# Altium PCB Layout.PcbDoc
Units mm, origin at the board's own origin, x right, y up, seen from the top; angles counter-clockwise.
Board outline 31.5 x 41.02 mm, 2 copper layers (Top Layer, Bottom Layer); 9 components, 9 nets, 53 pads, 7 vias.
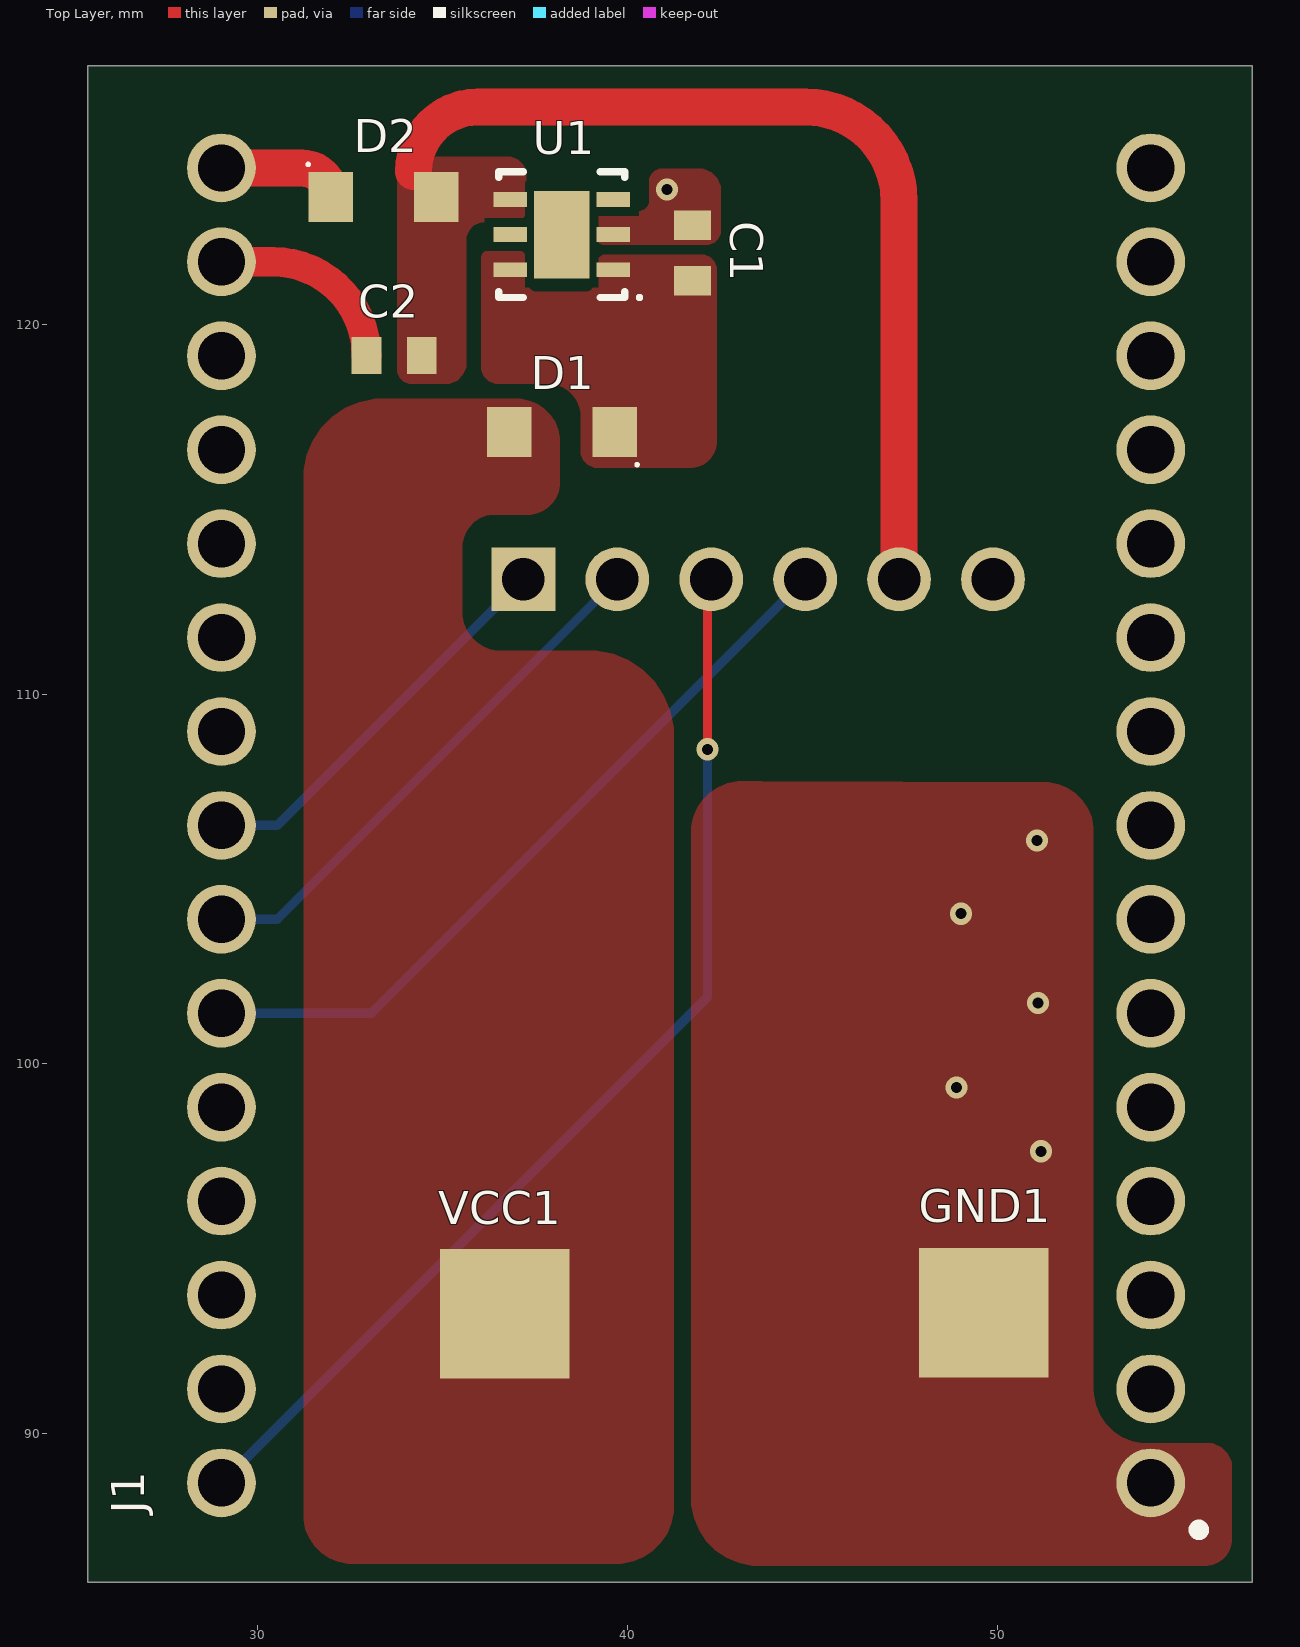
[diagram p0: Top Layer view]
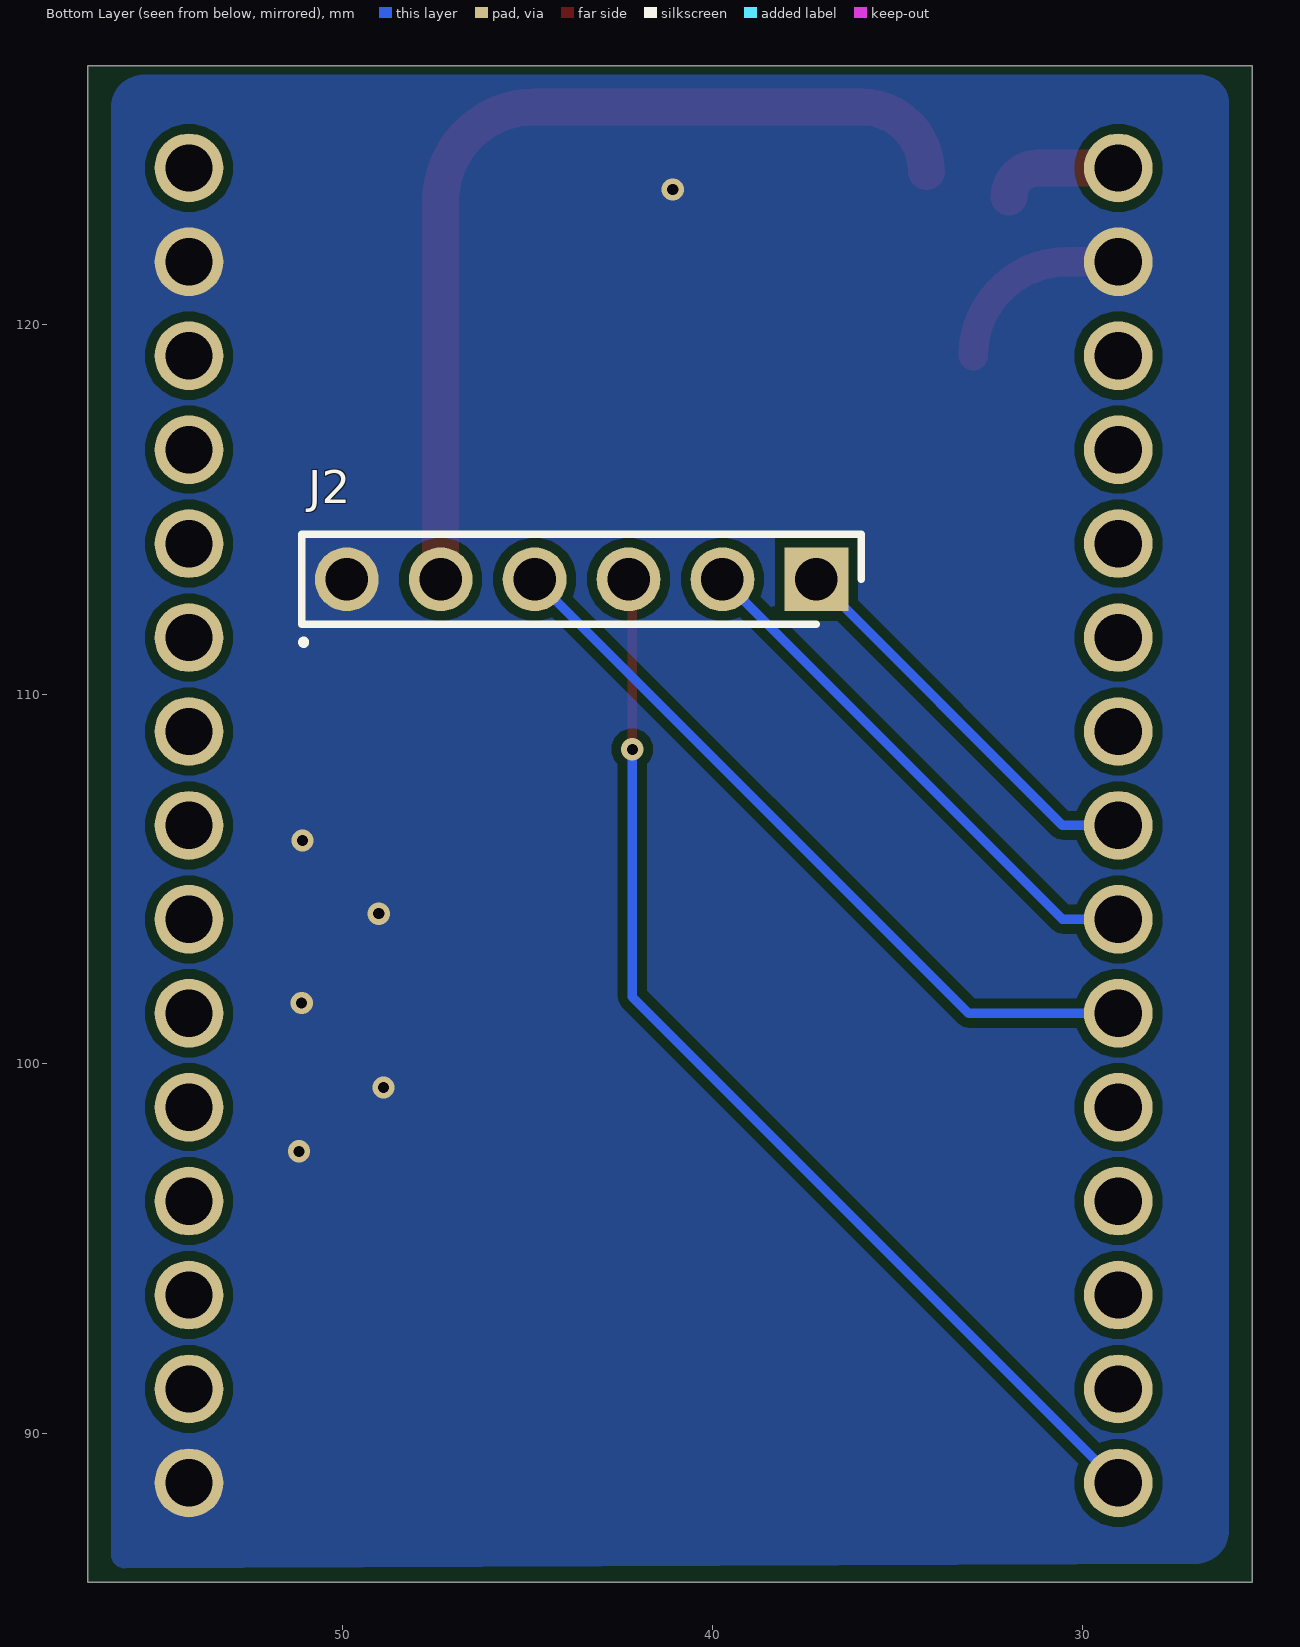
[diagram p1: Bottom Layer view, seen from below]

## Layer stack, top to bottom
Top Solder: solder mask 0.0102, Solder Resist, Dk 3.5
Top Layer: signal copper 0.0356
Dielectric 1: dielectric 0.32, FR-4, Dk 4.8
Bottom Layer: signal copper 0.0356
Bottom Solder: solder mask 0.0102, Solder Resist, Dk 3.5

## Board outline
25.4,85.979 56.896,85.979 56.896,127 25.4,127

## Design rules (kind name [scope] priority, off if disabled: settings)
Clearance [All] p1: gap=0.254 ignorepadtopadclearanceinfootprint=TRUE
PolygonConnect [All] p1: connectstyle=Direct reliefconductorwidth=0.254 reliefentries=4 polygonreliefangle="90 Angle" airgapwidth=0.254
RoutingVias [All] p1: holewidth=0.711 width=1.27 viastyle="Through Hole" minholewidth=0.711 minwidth=1.27 maxholewidth=0.711 maxwidth=1.27
SolderMaskExpansion [All] p1: expansion=0.102 istentingtop=FALSE
Width [All] p1: maxlimit=5 minlimit=0.254 preferedwidth=0.254 minimp=50.000000 maximp=50.000000 favimp=50.000000
30 further rules are at their usual default settings.

## Components (designator, comment, footprint, x,y, rotation, side; value= is the part's Value field where it differs from the comment)
C1 "1 uF" C0603 41.783,121.92 r270 top
C2 "1 uF" C0603 33.706,119.177 r0 top
D1 "RBR2MM40BTR" DIODO_SOD-123FL-2 38.227,117.094 r180 top
D2 "RBR2MM40BTR" DIODO_SOD-123FL-2 33.401,123.444 r0 top
GND1 "Ground Pad" PAD_ALIMENTAÇÃO_MINI 49.632,93.269 r0 top
J1 "ESP32" "Modulo ESP32" 53.801,88.671 r90 top
J2 "Male Header 6" "MALE HEADER 6" 37.186,113.106 r0 bottom
U1 "LDL112PV33R" DFN-6 38.225,122.428 r180 top
VCC1 "Source Pad" PAD_ALIMENTAÇÃO_MINI 36.678,93.243 r0 top

## Footprints (in the part's own frame and the unit in brackets; to place one, negate y for a bottom-side part, rotate by r counter-clockwise, add the part's x,y. Pads: shape width x height; smd on the part's side, far side on the other; paste and mask are expansions set on the pad)
C0603 [mm]
  rect 0.8x1 smd: 1(-0.763,-0.018) 2(0.737,-0.018)
  body extent -0.86,-0.49 0.84,0.41, height 0.8
DFN-6 [mm] "SON, 6-Leads, Body 3,00x3,00mm, Pitch 0,95mm, Thermal Pad 2,37x1,49mm, IPC Medium Density"
  rect 0.9x0.4 smd: 1(-1.395,0.95) 2(-1.395,0) 3(-1.395,-0.95) 4(1.395,-0.95) 5(1.395,0) 6(1.395,0.95)
  rect 1.49x2.37 smd: 7(0,0)
  silkscreen extent -2.15,-1.7 1.7,1.75, body extent -1.6,-1.55 1.6,1.55, height 1
DIODO_SOD-123FL-2 [mm]
  rect 1.2x1.35 smd: A(1.425,0) C(-1.425,0)
  silkscreen extent -2.06,0.86 -2.01,0.91, body extent -1.75,-0.85 1.75,0.85, height 0.9
"MALE HEADER 6" [mm]
  rect 1.725x1.725 hole 1.15: PIN1(0,0)
  round 1.725 hole 1.15: PIN2(2.54,0) PIN3(5.08,0) PIN4(7.62,0) PIN5(10.16,0) PIN6(12.7,0)
  silkscreen extent -1.21,-1.22 13.91,1.22, body extent -1.07,-1.17 13.77,1.17, height 10.37
"Modulo ESP32" [mm]
  round 1.86 hole 1.28: 3V3(35.56,24.779) EN(0,-0.352) GND(33.02,-0.352) GND(33.02,24.779) PIN2(2.54,-0.352) PIN3(5.08,-0.352) PIN4(7.62,-0.352) PIN5(10.16,-0.352) PIN6(12.7,-0.352) PIN7(15.24,-0.352) PIN8(17.78,-0.352) PIN9(20.32,-0.352) PIN10(22.86,-0.352) PIN11(25.4,-0.352) PIN12(27.94,-0.352) PIN13(30.48,-0.352) PIN16(0,24.779) PIN17(2.54,24.779) PIN18(5.08,24.779) PIN19(7.62,24.779) PIN20(10.16,24.779) PIN21(12.7,24.779) PIN22(15.24,24.779) PIN23(17.78,24.779) PIN24(20.32,24.779) PIN25(22.86,24.779) PIN26(25.4,24.779) PIN27(27.94,24.779) PIN28(30.48,24.779) VIN(35.56,-0.352)
  silkscreen extent -1.4,-1.78 -1.14,-1.52, body extent -5.66,-1.52 45.27,26.98, height 12.2
PAD_ALIMENTAÇÃO_MINI [mm]
  rect 3.5x3.5 smd: A(0,0)

## Part data
C1 C2: library part GMK107BJ105KAHT, "CAP CER 1uF 35V X5R 0603", Manufacturer="TAIYO YUDEN", Operating Temperature="-55 C ~ 85 C", Package / Case="0603 (1608 Metric)", Supplier Part Number 1=963-GMK107BJ105KAHT, Tolerance=10%, Voltage - Rated="35 VDC", Category="Ceramic Capacitor", ComponentLink1Description=Datasheet, ComponentLink1URL=https://br.mouser.com/datasheet/2/396/taiyo_yuden_12132018_mlcc11_hq_e-1510082.pdf, ComponentLink2Description="Mouser Link", ComponentLink2URL=https://br.mouser.com/ProductDetail/Taiyo-Yuden/GMK107BJ105KAHT?qs=%2Fha2pyFadugfgsXIlkotQ92wbBztYfVCYQK4eynXE%252B0k6svEXRnruHVeQhZpuewN, Dieletric=X5R, ESR=-, Library Control - Checked Footprint=Yes, Library Control - Checked Schematic=Yes, Library Control - Last Update="28/06/2021 00:40", Library Control - Person that Checked Footprint=Nikaum, Library Control - Person that Checked Schematic=Nikaum, Library Control - Person that did the Last Update Footprint=Nikaum, Library Control - Person that did the Last Update Schematic=Nikaum, Library Ref=Capacitor, Part Number=GMK107BJ105KAHT, Price="1= 0.16, 10= 0,095, 100= 0,049 (USD)", Size / Dimension="1,60 L x 0,80 W x 0,90 H", Supplier 1=MOUSER
D1 D2: "DIODE SCHOTTKY 40V 2A SOD-123FL-2", Current - Average Rectified (Io)="2 A", Current - Reverse Leakage @ Vr="80 uA @ 40V", Manufacturer="ROHM Semiconductor", Max Forward Surge Current (Ifsm)="30 A", Operating Temperature="- 55 C ~ + 150 C", Package / Case=SOD-123FL-2, Supplier Part Number 1=755-RBR2MM40BTR, Voltage - DC Reverse (Vr) (Max)="40 V", Voltage - Forward (Vf) (Max) @ If="560 mV @ 2A", Category="Schottky Diodes & Rectifiers", ComponentLink1Description="Mouser Link", ComponentLink1URL=https://br.mouser.com/ProductDetail/?qs=sErY3DeL0TgU%252BzPQs2wkpg%3D%3D, ComponentLink2Description=Datasheet, ComponentLink2URL=https://br.mouser.com/datasheet/2/348/rbr2mm40btr_e-1870596.pdf, Diode Type=Schottky, Library Control - Last Update="07/10/2022 17:54", Library Control - Person that did the Last Update Schematic="Maria Laura", Library Ref=Diodo/Led, Part Number=RBR2MM40BTR, Price="1=0,5; 10=0,414; 100=0,282", Supplier 1=Mouser
GND1: library part "Ground Pad Mini Sumô", "GND PAD MINI SUMÔ", Cable AWG="20 / 18 (AWG)", Library Ref=Pads, Recomended Category="Mini Sumô", Size="3.5 x 3.5 (mm)"
J1: library part "Modulo ESP32", "Header Modulo ESP32", Library Control - Checked Footprint=Nikaum, Library Control - Checked Schematic=Nikaum, Library Control - Person that did the Last Update Schematic=Nikaum, Library Control - Persont that did the Last Update Footprint=Nikaum, Library Ref=Header, Number of Contacts=15
U1: "IC REG LINEAR 5V 200mA SOT-89-4"
VCC1: library part "Source Pad Mini Sumô", "VCC PAD MINI SUMÔ", Cable AWG="20 / 18 (AWG)", Library Ref=Pads, Recomended Category="Mini Sumô", Size="3.5 x 3.5 (mm)"
J2: Library Control - Checked Footprint=Yes, Library Control - Checked Schematic=Yes, Library Control - Last Update=02/10/2022, Library Control - Person that Checked Footprint=Cage, Library Control - Person that Checked Schematic=Cage, Library Control - Person that did the Last Update Schematic=Cage, Library Control - Persont that did the Last Update Footprint=Cage, Library Ref=Header, Number of Contacts=6, System=Connector

## Via types
v1: diameter 0.6, hole 0.3, Top Layer to Bottom Layer, 7 vias

## Nets (pads, with @x,y where several pads share a name; then routed paths per layer and width w, separated by ;. In a path a pad name is that pad's centre, name@x,y a point inside that pad or via, vN(x,y) a via of type N, cw(c..) or ccw(c..) an arc to the next point about the centre after c; other vN are vias at no path point)
3V3: C2.2 D2.A J2.PIN5 U1.4 | length 25.8
  Top Layer w1: 34.214,124.13 cw(c35.966,124.13) 35.966,125.882 44.806,125.882 cw(c44.806,123.342) 47.346,123.342 J2.PIN5
CS: J1.PIN23 J2.PIN1 | length 10.9
  Bottom Layer w0.254: J1.PIN23 30.531,106.451 J2.PIN1
GND: C1.1 C2.1 GND1.A J1.EN J1.GND J2.PIN6 U1.2 | length 5.4
  Top Layer w0.8: J1.GND@29.021,121.691 30.41,121.691 cw(c30.41,119.159) C2.1
  other v1: 51.181,97.638 48.895,99.365 51.105,101.651 49.022,104.064 51.079,106.045 41.072,123.647
MISO: J1.PIN21 J2.PIN4 | length 20.6
  Bottom Layer w0.254: J1.PIN21 33.071,101.371 J2.PIN4
MOSI: J1.PIN16 J2.PIN3 | length 29.9
  Top Layer w0.254: v1(42.164,108.509) 42.164,113.005 J2.PIN3
  Bottom Layer w0.254: J1.PIN16 42.164,101.814 v1(42.164,108.509)
NetD1_A: D1.A VCC1.A
NetD2_C: D2.C J1.3V3 | length 3.4
  Top Layer w1: J1.3V3 31.189,124.231 cw(c31.189,123.444) D2.C
SCK: J1.PIN22 J2.PIN2 | length 14.5
  Bottom Layer w0.254: J1.PIN22 30.531,103.911 J2.PIN2
VBAT: C1.2 D1.C U1.1 U1.6
pads on no net: J1.PIN2 J1.PIN3 J1.PIN4 J1.PIN5 J1.PIN6 J1.PIN7 J1.PIN8 J1.PIN9 J1.PIN10 J1.PIN11 J1.PIN12 J1.PIN13 J1.PIN17 J1.PIN18 J1.PIN19 J1.PIN20 J1.PIN24 J1.PIN25 J1.PIN26 J1.PIN27 J1.PIN28 J1.VIN U1.3 U1.5 U1.7

## Polygon pours and split planes (outlines as drawn)
GND on Top Layer "GND_L01_P013" (solid, pour order 13): 43.637,107.645 43.104,107.645 ccw(c43.104,106.274) 41.732,106.274 41.732,88.24 ccw(c43.536,88.24) 43.536,86.436 55.626,86.436 ccw(c55.626,87.147) 56.337,87.147 56.337,89.103 ccw(c55.702,89.103) 55.702,89.738 54.077,89.738 cw(c54.077,91.211) 52.603,91.211 52.603,106.274 ccw(c51.257,106.274) 51.257,107.62
NetD1_A on Top Layer "NETD1_A_L01_P012" (solid, pour order 12): 37.008,117.983 cw(c37.008,116.815) 38.176,116.815 38.176,115.722 cw(c37.313,115.722) 37.313,114.859 36.424,114.859 ccw(c36.424,113.97) 35.535,113.97 35.535,112.217 ccw(c36.576,112.217) 36.576,111.176 38.938,111.176 cw(c38.938,108.864) 41.25,108.864 41.25,88.036 cw(c39.7,88.036) 39.7,86.487 32.563,86.487 cw(c32.563,87.808) 31.242,87.808 31.242,115.849 cw(c33.376,115.849) 33.376,117.983
3V3 on Top Layer "3V3_L01_P011" (solid, pour order 11): 33.782,124.028 cw(c34.29,124.028) 34.29,124.536 36.754,124.536 cw(c36.754,124.028) 37.262,124.028 37.262,123.114 cw(c36.906,123.114) 36.906,122.758 36.119,122.758 ccw(c36.119,122.276) 35.636,122.276 35.636,118.948 cw(c35.077,118.948) 35.077,118.389 34.163,118.389 cw(c34.163,118.77) 33.782,118.77
VBAT on Top Layer "Top Layer-VBAT" (solid, pour order 10): 38.735,116.586 ccw(c39.192,116.586) 39.192,116.129 41.707,116.129 ccw(c41.707,116.84) 42.418,116.84 42.418,121.463 ccw(c41.986,121.463) 41.986,121.895 39.294,121.895 ccw(c39.294,121.742) 39.141,121.742 39.141,121.183 cw(c38.837,121.183) 38.837,120.879 37.567,120.879 cw(c37.567,121.158) 37.287,121.158 37.262,121.514 37.262,121.768 ccw(c37.033,121.768) 37.033,121.996 36.246,121.996 ccw(c36.246,121.793) 36.043,121.793 36.043,118.872 ccw(c36.525,118.872) 36.525,118.389 37.871,118.389 cw(c37.871,117.526) 38.735,117.526
GND on Top Layer "GND_L01_P008" (solid, pour order 8): 39.37,122.149 cw(c39.37,122.352) 39.167,122.352 39.167,122.936 cw(c39.294,122.936) 39.294,123.063 40.31,123.063 ccw(c40.31,123.342) 40.589,123.342 40.589,123.876 cw(c40.919,123.876) 40.919,124.206 41.935,124.206 cw(c41.935,123.622) 42.52,123.622 42.52,122.53 cw(c42.139,122.53) 42.139,122.149
GND on Bottom Layer "GND_L02_P000" (solid, pour order 0): 26.924,86.487 cw(c26.924,87.376) 26.035,87.376 26.035,125.984 cw(c26.797,125.984) 26.797,126.746 55.372,126.746 cw(c55.372,125.857) 56.261,125.857 56.261,86.741 cw(c55.88,86.741) 55.88,86.36

## Silkscreen, mask and mechanical layers (free items; w line width, h text height)
Bottom Overlay:
  circle w0.254: c51.054,111.404 r0.025